# EAGLE board Esquematico (EAGLE 9.5.2)

Size 70 x 100 mm. Coordinates in mm from the lower left corner, seen from the top.
Outline: 0,0 70,0 70,100 0,100 0,0
Copper layers (1*16): Top 0.035mm / dielectric 1.5mm / Bottom 0.035mm
Design rules "default": minimum track width 6mil, minimum drill 0.35mm, track to track 6mil, track to pad 6mil, pad to pad 6mil, via to via 6mil, smd to smd 6mil, copper to edge 40mil, drill to drill 6mil, minimum pad ring 10mil, minimum via ring 8mil, stop-mask expansion 4mil, vias tented up to drill 0mil, thermal gap 10mil

## Footprints (pad centres in the part's own frame; a part is rotated, then mirrored left to right if it is on the bottom)
W237-102 = drill 1.194 long: 1 -2.5,-1.27; 2 2.5,-1.27
RECE.20279.001E.01 = smd 1.2 x 2.5: 1 -1.685,0; 2 1.685,0 | smd 1.15 x 1.2: 3 0,-1.73
CR2032-MFR-RH = drill 1 pad 1.5: 1 10.175,5.075; 2 10.175,-5.075; 3 -5.025,0
_0805 = smd 1.2 x 1.3: 1 -1.016,0; 2 1.016,0
0805_NOTHERMALS = smd 1.3 x 1.5: 1 -0.95,0; 2 0.95,0
SOD-323 = smd 0.63 x 0.83: A 1.15,0; C -1.15,0
RASPBERRYPIZEROWV13 = drill 1.11 pad 1.665 square: 1 -23.885,9.92; 41 24.375,7.38; 43 21.835,4.84 | drill 1.11 pad 1.665: 2 -23.885,12.46; 3 -21.345,9.92; 4 -21.345,12.46; 5 -18.805,9.92; 6 -18.805,12.46; 7 -16.265,9.92; 8 -16.265,12.46; 9 -13.725,9.92; 10 -13.725,12.46; 11 -11.185,9.92; 12 -11.185,12.46; 13 -8.645,9.92; 14 -8.645,12.46; 15 -6.105,9.92; 16 -6.105,12.46; 17 -3.565,9.92; 18 -3.565,12.46; 19 -1.025,9.92; 20 -1.025,12.46; 21 1.515,9.92; 22 1.515,12.46; 23 4.055,9.92; 24 4.055,12.46; 25 6.595,9.92; 26 6.595,12.46; 27 9.135,9.92; 28 9.135,12.46; 29 11.675,9.92; 30 11.675,12.46; 31 14.215,9.92; 32 14.215,12.46; 33 16.755,9.92; 34 16.755,12.46; 35 19.295,9.92; 36 19.295,12.46; 37 21.835,9.92; 38 21.835,12.46; 39 24.375,9.92; 40 24.375,12.46; 42 21.835,7.38; 44 24.375,4.84 | hole 2.8: -28.755,11.5; -28.755,-11.5; 29.245,-11.5; 29.245,11.5
3071 = drill 1.11 pad 1.665: 1 0,0; 2 2.54,0; 3 5.08,0; 4 7.62,0; 5 10.16,0; 6 12.7,0; 7 15.24,0; 8 17.78,0; 9 20.32,0; 10 10.16,25.4; 11 7.62,25.4; 12 5.08,25.4; 13 2.54,25.4; 14 0,25.4
SOIC127P1032X265-16N = smd 1.925 x 0.65: 1 -4.712,4.445; 2 -4.712,3.175; 3 -4.712,1.905; 4 -4.712,0.635; 5 -4.712,-0.635; 6 -4.712,-1.905; 7 -4.712,-3.175; 8 -4.712,-4.445; 9 4.712,-4.445; 10 4.712,-3.175; 11 4.712,-1.905; 12 4.712,-0.635; 13 4.712,0.635; 14 4.712,1.905; 15 4.712,3.175; 16 4.712,4.445
1X03 = drill 1.016 pad 1.88: 1 0,0; 2 2.54,0; 3 5.08,0
1X01_OVAL = drill 1 pad 1.676 long: 1 0,0
SRD = drill 1.34 pad 1.84: 1 0,0 | drill 0.8 pad 1.3: 2 2,6; 3 2,-6; 4 14.2,6; 5 14.2,-6
MINI-FLAT-16 = smd 1 x 0.5: 1 -3.24,4.445; 2 -3.24,3.175; 3 -3.24,1.905; 4 -3.24,0.635; 5 -3.24,-0.635; 6 -3.24,-1.905; 7 -3.24,-3.175; 8 -3.24,-4.445; 9 3.24,-4.445; 10 3.24,-3.175; 11 3.24,-1.905; 12 3.24,-0.635; 13 3.24,0.635; 14 3.24,1.905; 15 3.24,3.175; 16 3.24,4.445
R0402 = smd 0.6 x 0.7: 1 -0.5,0; 2 0.5,0
FE06 = drill 0.813 long: 1 -6.35,0; 2 -3.81,0; 3 -1.27,0; 4 1.27,0; 5 3.81,0; 6 6.35,0
XCVR_RFM69HW-868S2 = smd 2.81 x 1.21: 1 -9.05,7; 2 -9.05,5; 3 -9.05,3; 4 -9.05,1; 5 -9.05,-1; 6 -9.05,-3; 7 -9.05,-5; 8 -9.05,-7; 9 9.05,-7; 10 9.05,-5; 11 9.05,-3; 12 9.05,-1; 13 9.05,1; 14 9.05,3; 15 9.05,5; 16 9.05,7
MOD_GSM_A6 = drill 1.11: EAR_L 12.7,11.45; EAR_R 10.16,11.45; GND 2.54,11.45; HRX 0,11.45; HTX -2.54,11.45; INT 7.62,-11.45; IO14 0,-11.45; MIC2_P 15.24,11.45; MIC+ 12.7,-11.45; MIC- 15.24,-11.45; NETLED 2.54,-11.45; PWR 5.08,-11.45; RST 10.16,-11.45; URX 5.08,11.45; UTX 7.62,11.45; VCC -2.54,-11.45

## Placement (x,y rotation side)
ALARMA  [W237-102]  63.42,39.01 90 top
ANT1  RECE.20279.001E.01  [RECE.20279.001E.01]  63.06,90.17 180 bottom
BT1  CR2032_MFR_RH  [CR2032-MFR-RH]  24.02,20.96 180 bottom
C1  0.1F  [_0805]  5.55,81.72 180 bottom
C3  [0805_NOTHERMALS]  26.22,79.71 180 bottom
D1  250mA/100V  [SOD-323]  49.46,64.62 0 bottom
D2  250mA/100V  [SOD-323]  49.31,62.47 0 bottom
D3  250mA/100V  [SOD-323]  49.26,60.32 0 bottom
D4  250mA/100V  [SOD-323]  49.21,58.02 0 bottom
IC1  RASPBERRY_PI_ZERO_W_(V1.3)  [RASPBERRYPIZEROWV13]  33.8,83.8 0 top
IC2  3071  [3071]  14.49,35.62 0 top
IC3  DS3231N_DIP  [SOIC127P1032X265-16N]  16.18,81.09 0 bottom
INT1  [W237-102]  6.5,59 270 top
INT2  [W237-102]  6.5,49.01 270 top
INT3  [W237-102]  6.55,39.08 270 top
INT4  [W237-102]  6.55,29.16 270 top
J1  Modulo Pir  [1X03]  67.55,95.73 270 top
JP1  [1X01_OVAL]  62.83,85.9 270 bottom
K1  SRD-05VDC-SL-C  [SRD]  57.65,11 180 top
K2  SRD-05VDC-SL-C  [SRD]  57.75,27.25 180 top
K3  SRD-05VDC-SL-C  [SRD]  57.75,43.32 180 top
K4  SRD-05VDC-SL-C  [SRD]  57.75,59.43 180 top
NEO_PIXEL  [W237-102]  63.42,19 90 top
OK1  TLP283-4  [MINI-FLAT-16]  24.22,49.92 0 bottom
OK2  TLP283-4  [MINI-FLAT-16]  48.87,44.3 90 bottom
OUT1  [W237-102]  63.42,29 90 top
OUT3  [W237-102]  63.42,48.97 90 top
OUT4  [W237-102]  63.45,59 90 top
R1  220  [R0402]  52.09,38.02 90 bottom
R2  220  [R0402]  49.39,38.15 90 bottom
R3  220  [R0402]  47.28,38.26 90 bottom
R4  220  [R0402]  45.43,38.39 90 bottom
R6  220  [R0402]  30.83,53.09 0 bottom
R7  220  [R0402]  30.8,50.55 0 bottom
R8  220  [R0402]  30.83,48.02 180 bottom
R9  220  [R0402]  31.09,45.48 0 bottom
R10  1k  [R0402]  17.7,54.37 0 bottom
R11  1k  [R0402]  17.71,51.84 0 bottom
R12  1k  [R0402]  17.77,49.29 0 bottom
R13  1k  [R0402]  17.51,46.74 0 bottom
R14  10K  [R0402]  25.42,85.51 180 bottom
R15  10K  [R0402]  25.5,83.21 180 bottom
R16  10K  [R0402]  6.42,85.54 0 bottom
R17  10K  [R0402]  6.46,84.24 0 bottom
SV3  [FE06]  67.58,81.44 90 top
U1  RFM69HW-868S2  [XCVR_RFM69HW-868S2]  43.17,78.14 90 bottom
U$1  MOD_GSM_A6_DIV  [MOD_GSM_A6]  17.13,78.08 180 top
X1  [W237-102]  6.55,19.2 270 top

## Library data of the parts
ALARMA INT1-INT4 NEO_PIXEL OUT1 OUT3 OUT4 X1 = con-wago-500; MPN: 237-102; OC_FARNELL: unknown; OC_NEWARK: 70K9898
ANT1 = RECE.20279.001E.01; DESCRIPTION: IPEX MHF Receptacle; HEIGHT: mm; MANUFACTURER_NAME: Taoglas; MANUFACTURER_PART_NUMBER: RECE.20279.001E.01; MOUSER_PART_NUMBER: N/A; MOUSER_PRICE-STOCK: https://www.mouser.com/Search/Refine.aspx?Keyword=N%2FA
BT1 = CR2032_MFR_RH; DESCRIPTION: Coin Cell Battery 3V 3-PIN HORZ 225mAh 20.2 x 5.45mm; HEIGHT: mm; MANUFACTURER_NAME: RENATA; MANUFACTURER_PART_NUMBER: CR2032 MFR RH; MOUSER_PART_NUMBER: 614-CR2032RH-MFR; MOUSER_PRICE-STOCK: https://www.mouser.com/Search/Refine.aspx?Keyword=614-CR2032RH-MFR
C1 C3 JP1 = microbuilder
D1-D4 = SparkFun-DiscreteSemi; PROD_ID: DIO-09646
IC1 = Raspberry_Pi_Zero_W_(v1.3); DESCRIPTION: Raspberry Pi Zero W (v1.3) Single-board Computers; HEIGHT: mm; MANUFACTURER_NAME: RASPBERRY-PI; MANUFACTURER_PART_NUMBER: Raspberry Pi Zero W (v1.3)
IC2 = 3071; ALLIED_NUMBER: 70928125; ALLIED_PRICE-STOCK: https://www.alliedelec.com/adafruitindustries-3071/70928125/; DESCRIPTION: LoRa Packet Radio Breakout; HEIGHT: 3.5mm; MANUFACTURER_NAME: Adafruit; MANUFACTURER_PART_NUMBER: 3071; MOUSER_PART_NUMBER: 485-3071; MOUSER_PRICE-STOCK: https://www.mouser.com/Search/Refine.aspx?Keyword=485-3071
IC3 = DS3231N_DIP; DESCRIPTION: 32.768kHz CMOS TCXO Oscillator Through Hole 5V 220A; HEIGHT: 2.65mm; MANUFACTURER_NAME: Maxim Integrated; MANUFACTURER_PART_NUMBER: DS3231N/DIP; MOUSER_PART_NUMBER: N/A; MOUSER_PRICE-STOCK: https://www.mouser.com/Search/Refine.aspx?Keyword=N%2FA
J1 = SparkFun-Connectors; PROD_ID: XXX-00000
K1-K4 = SRD-05VDC-SL-C; DESCRIPTION: Relay; HEIGHT: mm; MANUFACTURER_NAME: Songle Relay; MANUFACTURER_PART_NUMBER: SRD-05VDC-SL-C
OK1 OK2 = optocoupler; OC_FARNELL: unknown; OC_NEWARK: unknown
R1-R4 R6-R17 = rcl; SPICEPREFIX: R
SV3 = con-lsta; OC_FARNELL: unknown; OC_NEWARK: unknown
U1 = RFM69HW-868S2; AVAILABILITY: Unavailable; DESCRIPTION: General ISM < 1GHz Transceiver Module 868MHz Antenna Not Included Surface Mount; MF: RF; MP: RFM69HW-868S2; PACKAGE: SMD-16 RF Solutions; PRICE: None
U$1 = GPRS_A6 Mini

## Nets
3.3V: C1.1 C3.1 IC1.1 IC2.1 IC3.2 R10.2 R11.2 R12.2 R13.2 R14.2 R15.2 R16.2 R17.2 SV3.2 U1.8
5V: D1.C D2.C D3.C D4.C IC1.2 J1.3 K1.2 K2.2 K3.2 K4.2 OK1.1 OK1.3 OK1.5 OK1.7 U$1.VCC X1.2
32K: SV3.6
ANT_LORA: ANT1.3 JP1.1 U1.10
COM1: K1.1 OUT1.2
COM2: ALARMA.2 K2.1
COM3: K3.1 OUT3.2
COM4: K4.1 OUT4.2
CS: IC2.8 U1.15
EAR_L: U$1.EAR_L
EAR_R: U$1.EAR_R
EN: IC1.24 IC2.3
G0: IC1.7 IC2.4 U1.2
G1: IC1.11 IC2.14 U1.3
G2: IC1.18 IC2.13 U1.4
G3: IC1.26 IC2.12 U1.5
G4: IC2.11 U1.6
G5: IC2.10 U1.7
G18: IC1.12 NEO_PIXEL.1
GND: ANT1.1 ANT1.2 BT1.3 C1.2 C3.2 IC1.6 IC2.2 IC3.5 IC3.6 IC3.7 IC3.8 IC3.9 IC3.10 IC3.11 IC3.12 IC3.13 INT1.2 INT2.2 INT3.2 INT4.2 J1.1 NEO_PIXEL.2 OK1.9 OK1.11 OK1.13 OK1.15 OK2.9 OK2.11 OK2.13 OK2.15 R1.1 R2.1 R3.1 R4.1 SV3.1 U1.9 U1.11 U$1.GND X1.1
HRX: U$1.HRX
HTX: U$1.HTX
INT: U$1.INT
INT1: IC1.29 OK1.16 R10.1
INT2: IC1.32 OK1.14 R11.1
INT3: IC1.33 OK1.12 R12.1
INT4: IC1.35 OK1.10 R13.1
INT5: IC1.37 J1.2
IO14: U$1.IO14
MIC2_P: U$1.MIC2_P
MIC+: U$1.MIC+
MIC-: U$1.MIC-
MISO: IC1.21 IC2.6 U1.13
MOSI: IC1.19 IC2.7 U1.14
N$1: IC3.1 R14.1
N$2: IC1.4
N$3: INT1.1 R6.1
N$4: OK1.2 R6.2
N$7: IC1.9
N$9: INT2.1 R7.1
N$10: OK2.2 R1.2
N$11: OK2.4 R2.2
N$12: OK2.6 R3.2
N$13: OK2.8 R4.2
N$15: OK1.4 R7.2
N$17: OK1.6 R8.1
N$18: INT3.1 R8.2
N$19: OK1.8 R9.1
N$22: IC1.14
N$23: IC1.17
N$26: IC1.20
N$28: INT4.1 R9.2
N$29: IC1.25
N$32: D4.A K4.3 OK2.10
N$33: D3.A K3.3 OK2.12
N$34: D2.A K2.3 OK2.14
N$35: D1.A K1.3 OK2.16
N$36: IC1.27
N$37: IC1.28
N$38: IC1.30
N$40: IC1.34
N$41: IC1.36
N$42: IC1.38
N$43: IC1.39
N$44: IC1.40
N$45: IC1.41
N$46: IC1.42
N$47: IC1.43
N$48: IC1.44
NETLED: U$1.NETLED
NO1: K1.4 OUT1.1
NO2: ALARMA.1 K2.4
NO3: K3.4 OUT3.1
NO4: K4.4 OUT4.1
OUT1: IC1.16 OK2.1
OUT3: IC1.22 OK2.5
OUT4: IC1.31 OK2.7
OUT_ALARMA: IC1.13 OK2.3
PWR: U$1.PWR
RST_GSM: U$1.RST
RST_LORA: IC1.15 IC2.9 U1.1
SCK: IC1.23 IC2.5 U1.12
SCL: IC1.5 IC3.16 R16.1 SV3.4
SDA: IC1.3 IC3.15 R17.1 SV3.3
SQW: IC3.3 R15.1 SV3.5
URX: IC1.8 U$1.URX
UTX: IC1.10 U$1.UTX
VBAT: BT1.1 BT1.2 IC3.14

## Tracks (layer width: path | path; a pad name or v marks a point on that pad's centre or on a via)
3.3V  (14 unrouted)
5V  (15 unrouted)
ANT_LORA  (2 unrouted)
COM1  (1 unrouted)
COM2  (1 unrouted)
COM3  (1 unrouted)
COM4  (1 unrouted)
CS  (1 unrouted)
EN  (1 unrouted)
G0  (2 unrouted)
G1  (2 unrouted)
G2  (2 unrouted)
G3  (2 unrouted)
G4  (1 unrouted)
G5  (1 unrouted)
G18  (1 unrouted)
GND  (38 unrouted)
INT1  (2 unrouted)
INT2  (2 unrouted)
INT3  (2 unrouted)
INT4  (2 unrouted)
INT5  (1 unrouted)
MISO  (2 unrouted)
MOSI  (2 unrouted)
N$1  (1 unrouted)
N$3  (1 unrouted)
N$4  (1 unrouted)
N$9  (1 unrouted)
N$10  (1 unrouted)
N$11  (1 unrouted)
N$12  (1 unrouted)
N$13  (1 unrouted)
N$15  (1 unrouted)
N$17  (1 unrouted)
N$18  (1 unrouted)
N$19  (1 unrouted)
N$28  (1 unrouted)
N$32  (2 unrouted)
N$33  (2 unrouted)
N$34  (2 unrouted)
N$35  (2 unrouted)
NO1  (1 unrouted)
NO2  (1 unrouted)
NO3  (1 unrouted)
NO4  (1 unrouted)
OUT1  (1 unrouted)
OUT3  (1 unrouted)
OUT4  (1 unrouted)
OUT_ALARMA  (1 unrouted)
RST_LORA  (2 unrouted)
SCK  (2 unrouted)
SCL  (3 unrouted)
SDA  (3 unrouted)
SQW  (2 unrouted)
URX  (1 unrouted)
UTX  (1 unrouted)
VBAT  (2 unrouted)